# Altium PCB Display.PcbDoc
Units mil, origin at the board's own origin, x right, y up, seen from the top; angles counter-clockwise.
Board outline 6000 x 4000 mil, 2 copper layers (Top Layer, Bottom Layer); 12 components, 77 nets, 63 pads, 9 vias.
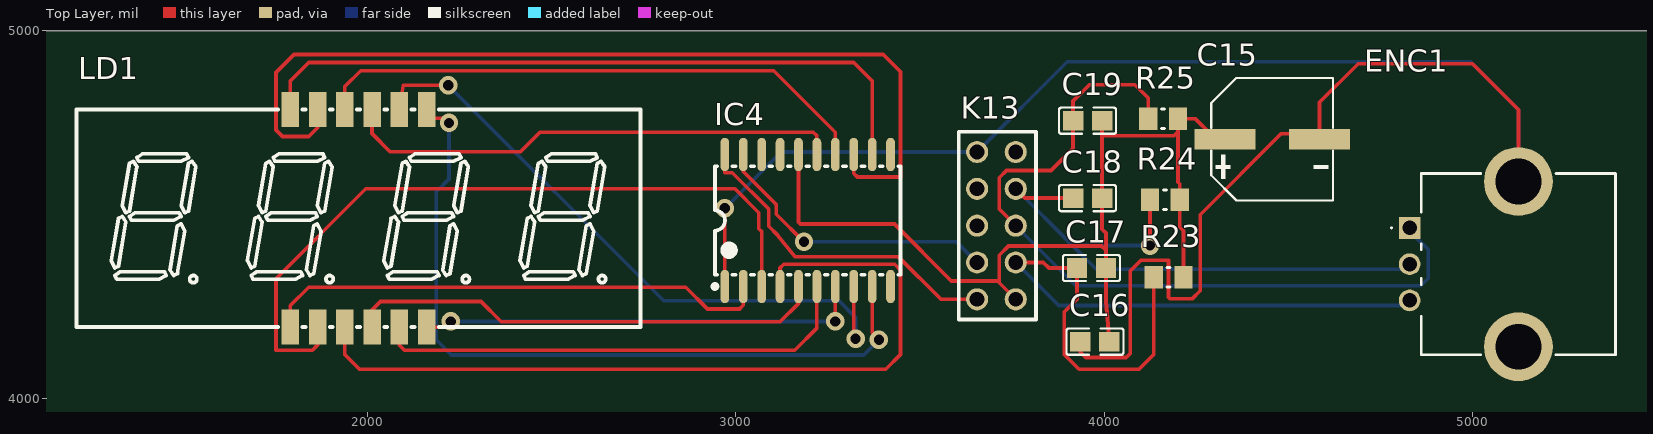
[diagram p0: Top Layer view]
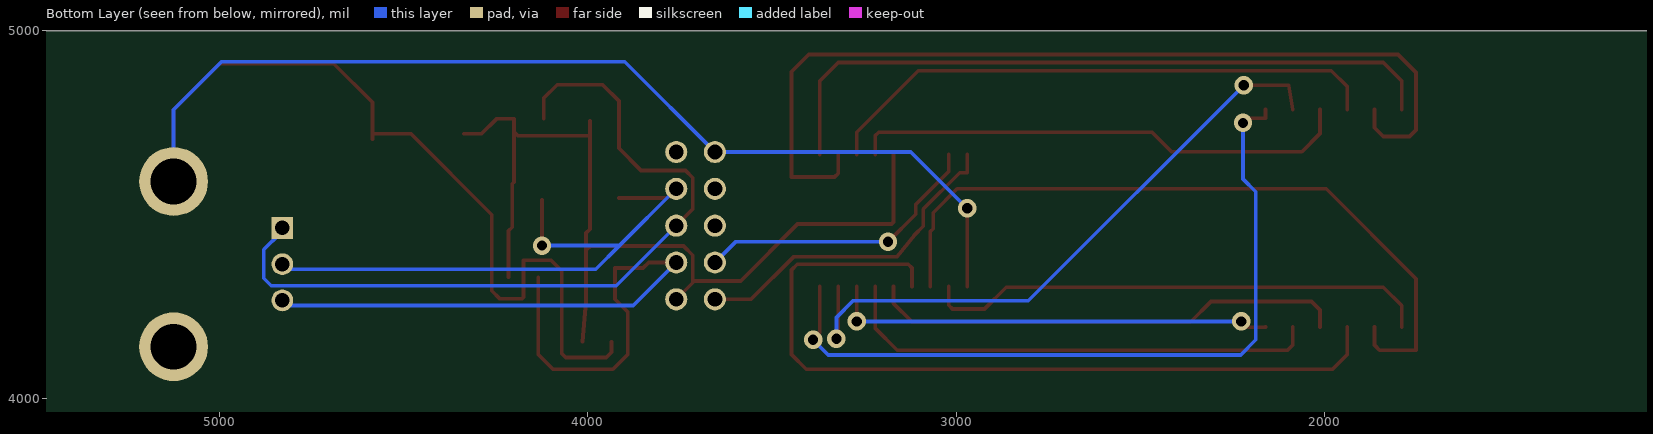
[diagram p1: Bottom Layer view, seen from below]

## Layer stack, top to bottom
Top Solder: solder mask 0.4, Solder Resist, Dk 3.5
Top Layer: signal copper 1.4
Dielectric 1: dielectric 12.6, FR-4, Dk 4.8
Bottom Layer: signal copper 1.4
Bottom Solder: solder mask 0.4, Solder Resist, Dk 3.5

## Board outline
1000,1000 7000,1000 7000,5000 1000,5000

## Design rules (kind name [scope] priority, off if disabled: settings)
Clearance [All] p1: gap=10 ignorepadtopadclearanceinfootprint=FALSE except(0: Arc-Hole Track-Hole SMDPad-Hole THPad-Hole Via-Hole Fill-Hole Poly-Hole Region-Hole Text-Hole)
PolygonConnect [All] p1: connectstyle=Relief reliefconductorwidth=10 reliefentries=4 polygonreliefangle="90 Angle" airgapwidth=10
RoutingVias [All] p1: holewidth=28 width=50 viastyle="Through Hole" minholewidth=28 minwidth=50 maxholewidth=28 maxwidth=50
SolderMaskExpansion [All] p1: expansion=4 istentingtop=FALSE
Width [All] p1: maxlimit=10 minlimit=10 preferedwidth=10
30 further rules are at their usual default settings.

## Components (designator, comment, footprint, x,y, rotation, side; value= is the part's Value field where it differs from the comment)
C15 "100uF" "C4 100uF" 4456.37,4705 r0 top
C16 "100nF" "C6,7,12,13 10nF" 3975,4155 r0 top
C17 "10nF" "C6,7,12,13 10nF" 3965.63,4355 r0 top
C18 "10nF" "C6,7,12,13 10nF" 3955,4545 r0 top
C19 "10nF" "C6,7,12,13 10nF" 3955,4755 r0 top
ENC1 "PEC11R-4225F-N0024" "ENC1 draai encoder" 4829.72,4464.02 r270 top
IC4 "TM1637" "IC4 Led driver" 3195,4484.13 r0 top
K13 "" BOxHeader_10 3670,4315 r90 top
LD1 "TOF-F4401AMG-N" LED1 1975,4490 r0 top
R23 "10K" RESC2013X50X30ML20T20 4175,4330 r0 top
R24 "10K" RESC2013X50X30ML20T20 4165,4540 r0 top
R25 "10K" RESC2013X50X30ML20T20 4160,4760 r0 top

## Footprints (in the part's own frame and the unit in brackets; to place one, negate y for a bottom-side part, rotate by r counter-clockwise, add the part's x,y. Pads: shape width x height; smd on the part's side, far side on the other; paste and mask are expansions set on the pad)
BOxHeader_10 [mil]
  round 60 hole 40: 1(-45,-90) 2(-45,15) 3(55,-90) 4(55,15) 5(155,-90) 6(155,15) 7(255,-90) 8(255,15) 9(355,-90) 10(355,15)
  silkscreen extent -100,-145 410,65
"C4 100uF" [mm]
  rect 4.2x1.4 smd: 1(-3.267,0) 2(3.267,0)
  silkscreen extent -4.2,-4.23 4.2,4.23
"C6,7,12,13 10nF" [mm] "C0805"
  rect 1.41x1.35 smd: 1(-1,0) 2(1,0)
  silkscreen extent -1.96,-0.9 1.96,0.9
"ENC1 draai encoder" [mm] "PEC11R4225FN0024"
  round 4.74 hole 3.16: 1(-3.2,7.5) 2(8.2,7.5)
  rect 1.5x1.5 hole 1: A1(0,0)
  round 1.5 hole 1: B1(5,0) C1(2.5,0)
  silkscreen extent -3.75,-1.3 8.75,14.2, body extent -10,-3.38 10,3.38, height 5.8
"IC4 Led driver" [mm] "SOP-20_L12.8-W7.5-P1.27-LS10.4-BL"
  oval 0.6x2.3 smd: 1(-5.715,-4.55) 2(-4.445,-4.55) 3(-3.175,-4.55) 4(-1.905,-4.55) 5(-0.635,-4.55) 6(0.635,-4.55) 7(1.905,-4.55) 8(3.175,-4.55) 9(4.445,-4.55) 10(5.715,-4.55) 11(5.715,4.55) 12(4.445,4.55) 13(3.175,4.55) 14(1.905,4.55) 15(0.635,4.55) 16(-0.635,4.55) 17(-1.905,4.55) 18(-3.175,4.55) 19(-4.445,4.55) 20(-5.715,4.55)
  silkscreen extent -6.55,-4.7 6.4,3.75
LED1 [mm] "LED-SEG-SMD_12P-L38.9-W15.0-P1.88-BL"
  rect 1.2x2.4 smd: 1(-4.7,-7.5) 2(-2.82,-7.5) 3(-0.94,-7.5) 4(0.94,-7.5) 5(2.82,-7.5) 6(4.7,-7.5) 7(4.7,7.5) 8(2.82,7.5) 9(0.94,7.5) 10(-0.94,7.5) 11(-2.82,7.5) 12(-4.7,7.5)
  silkscreen extent -19.45,-7.5 19.45,7.5
RESC2013X50X30ML20T20 [mm] "Chip Resistor, 2-Leads, Body 2.00x1.25mm, IPC Low Density"
  rect 1.25x1.55 smd: 1(-1.025,0) 2(1.025,0)
  silkscreen extent -0.1,-0.67 0.1,0.67, body extent -1.1,-0.72 1.1,0.72, height 0.5

## Part data
C15: library part "C4 100uF", BOM_JLCPCB Part Class="Extended Part", BOM_Manufacturer=Nichicon(尼吉康), BOM_Manufacturer Part=UWT1H101MNL1GS, BOM_Supplier=LCSC, BOM_Supplier Part=C445063, Contributor=LCSC, nameAlias=Capacitance, spicePre=C, spiceSymbolName=UWT1H101MNL1GS
C16 C17 C18 C19: library part "C6,7,12,13 10nF", BOM_JLCPCB Part Class="Extended Part", BOM_Manufacturer=CCTC(三环), BOM_Manufacturer Part=TCC0805X7R103M500DT, BOM_Supplier=LCSC, BOM_Supplier Part=C376921, Contributor=LCSC, nameAlias=Capacitance, spicePre=C, spiceSymbolName=TCC0805X7R103M500DT
ENC1: library part "ENC1 Draai encoder", "PEC11R-4225F-N0024Mechanical Encoder Rotary Incremental Flat 0.007N.m Straight Quadrature Digital Square Wave 24PPR Through Hole PC Pin", Manufacturer_Name=Bourns, Mouser Part Number=652-PEC11R-4225F-N24, Datasheet Link=https://www.bourns.com/docs/Product-Datasheets/PEC11R.pdf, Geometry.Height=31.5mm, Manufacturer_Part_Number=PEC11R-4225F-N0024, Mouser Price/Stock=https://www.mouser.co.uk/ProductDetail/Bourns/PEC11R-4225F-N0024?qs=Zq5ylnUbLm6NTsWtgy%252B2Zg%3D%3D
IC4: library part "IC4 Led driver", "TM1637(TA2007)", BOM_JLCPCB Part Class="Extended Part", BOM_Manufacturer=TM(天微), BOM_Manufacturer Part=TM1637(TA2007), BOM_Supplier=LCSC, BOM_Supplier Part=C5337160, Contributor=lcsc, spicePre=U, spiceSymbolName=TM1637(TA2007)
K13: library part "K Boxheader_10"
LD1: library part LED1, BOM_JLCPCB Part Class="Extended Part", BOM_Manufacturer=OASIS(李洲), BOM_Manufacturer Part=TOF-F4401AMG-N, BOM_Supplier=LCSC, BOM_Supplier Part=C325426, Contributor=LCSC, spicePre=L, spiceSymbolName=TOF-F4401AMG-N
R23 R24 R25: library part "R Resistor", Manufacturer="Vishay Dale", Part Number=CRCW08050000Z0EA

## Via types
v1: diameter 50, hole 28, Top Layer to Bottom Layer, 9 vias

## Nets (pads, with @x,y where several pads share a name; then routed paths per layer and width w, separated by ;. In a path a pad name is that pad's centre, name@x,y a point inside that pad or via, vN(x,y) a via of type N, cw(c..) or ccw(c..) an arc to the next point about the centre after c; other vN are vias at no path point)
+5: C15.1 C16.2 C17.2 C18.2 C19.2 IC4.16 K13.1 R23.2 R24.2 R25.2 | length 2644.4
  Top Layer w10: IC4.16 3170,4480 3175.52,4474.48 3430.66,4474.48 3585.13,4320 3710,4320 3715,4315 ; K13.1 3715,4315 ; C19.2 3994.37,4714 ; C16.2 4005,4264.37 C17.2 4005,4403 ; R23.2 4215.35,4456 4205.35,4466 R24.2 4205.35,4583.65 4200.35,4588.65 4200.35,4724.35 ; C15.1@4336.37,4720 4288,4720 4248,4760 R25.2 4200.35,4724.35 ; 3715,4315 3715,4320 3715,4390 3740,4415 3993,4415 4005,4403 ; 3994.37,4714 C18.2 3994.37,4460.63 4005,4450 4005,4403 ; 3994.37,4714 4190,4714 4200.35,4724.35
GND: C15.2 C16.1 ENC1.1 IC4.1 K13.10 | length 5044
  Top Layer w10: IC4.1 v1(2970,4517) ; C16.1 3935.63,4126.37 3950,4112 4060,4112 4071,4123 4071,4347 4100,4376 4175,4376 4175,4276 4179,4272 4240,4272 4261,4293 4261,4500 4481,4720 C15.2@4585,4720 ; C15.2 C15.2@4585,4720 ; ENC1.1 5125,4785 5000,4910 4690,4910 4585,4805 C15.2@4585,4720
  Bottom Layer w10: v1(2970,4517) 3123,4670 K13.10 3900,4915 4995,4915 5125,4785 ENC1.1
NetB1_1: 
NetB1_3: 
NetB1_4: 
NetB2_1: 
NetB2_4: 
NetC4_1: 
NetC6_2: 
NetC7_2: 
NetC11_1: 
NetC12_2: 
NetC13_2: 
NetC14_1: 
NetC14_2: 
NetC17_1: C17.1 ENC1.B1 K13.3 R23.1 | length 2030.8
  Top Layer w10: K13.3 3835,4370 3850,4355 C17.1 3926.26,4270 3892,4235.74 3892,4120 3932,4080 4094.65,4080 4134.65,4120 R23.1
  Bottom Layer w10: K13.3 3876.85,4253.15 ENC1.B1@4835,4253.15
NetC18_1: C18.1 ENC1.C1 K13.7 R24.1 | length 1666.1
  Top Layer w10: K13.7 3785,4545 C18.1 ; v1(4124.65,4416) R24.1
  Bottom Layer w10: K13.7 3914,4416 ; v1(4124.65,4416) 3914,4416 ; ENC1.C1@4835,4351.57 3978.43,4351.57 3914,4416
NetC19_1: C19.1 ENC1.A1 K13.5 R25.1 | length 2142.6
  Top Layer w10: K13.5 3715,4515 3715,4600 3735,4620 3855.63,4620 3915.63,4680 C19.1 3915.63,4808.63 3960,4853 4083.29,4853 4119.65,4816.65 R25.1
  Bottom Layer w10: K13.5 3923,4307 4860,4307 4880,4327 4880,4405 ENC1.A1@4835,4450
NetD1_1: 
NetD1_2: 
NetD2_1: 
NetIC2_1: 
NetIC2_2: 
NetIC2_6: 
NetIC2_7: 
NetIC3_1: 
NetIC3_2: 
NetIC3_3: 
NetIC3_10: 
NetIC3_11: 
NetIC3_16: 
NetIC3_17: 
NetIC3_23: 
NetIC3_24: 
NetIC3_25: 
NetIC3_26: 
NetIC3_27: 
NetIC3_30: 
NetIC3_31: 
NetIC3_32: 
NetIC3_33: 
NetIC3_34: 
NetIC3_35: 
NetIC3_38: 
NetIC3_39: 
NetIC3_41: 
NetIC3_44: 
NetIC3_45: 
NetIC3_46: 
NetIC3_47: 
NetIC3_48: 
NetIC4_2: IC4.2 LD1.1 | length 1388.6
  Top Layer w10: LD1.1 1789.96,4252.96 1840,4303 2864,4303 2923,4244 3010,4244 3020,4254 IC4.2
NetIC4_3: IC4.3 LD1.2 | length 2004
  Top Layer w10: LD1.2 1863.98,4145.98 1850,4132 1751,4132 1751,4326 1995,4570 2997.29,4570 3062,4505.29 3062,4462 3070,4454 IC4.3
NetIC4_4: IC4.4 LD1.3 | length 2234.6
  Top Layer w10: LD1.3 1937.99,4120 1977.99,4080 3407,4080 3447,4120 3447,4350 3431.72,4365.28 3130,4365.28 3120,4355.28 IC4.4
NetIC4_5: IC4.5 LD1.4 | length 1303.3
  Top Layer w10: LD1.4 2012.01,4241 2035.01,4264 2308,4264 2363,4209 3120,4209 3170,4259 IC4.5
NetIC4_6: IC4.6 LD1.5 | length 1326.4
  Top Layer w10: LD1.5 2086.02,4145.98 2100,4132 3160,4132 3220,4192 IC4.6
NetIC4_7: IC4.7 LD1.6 | length 1212.3
  Top Layer w10: LD1.6 2160.04,4194 2210,4194 v1(2226,4210) ; v1(3270,4210) IC4.7
  Bottom Layer w10: v1(2226,4210) v1(3270,4210)
NetIC4_8: IC4.8 LD1.8 | length 1757.6
  Top Layer w10: LD1.8 2097.02,4851 v1(2219,4851) ; IC4.8 3320,4168 v1(3325,4163)
  Bottom Layer w10: v1(2219,4851) 2804,4266 3280,4266 3325,4221 v1(3325,4163)
NetIC4_9: IC4.9 LD1.7 | length 2082
  Top Layer w10: LD1.7 2160.04,4762 2208,4762 v1(2221,4749) ; IC4.9 3370,4179 v1(3388.5,4160.5)
  Bottom Layer w10: v1(2221,4749) 2221,4597 2186,4562 2186,4160 2227,4119 3347,4119 v1(3388.5,4160.5)
NetIC4_12: IC4.12 LD1.12 | length 1898.9
  Top Layer w10: LD1.12 1789.96,4862.96 1840,4913 3320,4913 3370,4863 IC4.12
NetIC4_13: IC4.13 LD1.11 | length 2539.8
  Top Layer w10: LD1.11 1863.98,4735.98 1840,4712 1769,4712 1751,4730 1751,4886 1800,4935 3400,4935 3447,4888 3447,4602 3330,4602 3320,4612 IC4.13
NetIC4_14: IC4.14 LD1.10 | length 1542.5
  Top Layer w10: LD1.10 1937.99,4848 1980.99,4891 3103,4891 3270,4724 IC4.14
NetIC4_15: IC4.15 LD1.9 | length 1370.4
  Top Layer w10: LD1.9 2012.01,4720 2061.01,4671 2415,4671 2468,4724 3210,4724 3220,4714 IC4.15
NetIC4_19: IC4.19 K13.4 | length 798.8
  Top Layer w10: IC4.19 3020,4617 3109.69,4527.31 3109.69,4501.31 v1(3185,4426)
  Bottom Layer w10: v1(3185,4426) 3599,4426 K13.4
NetIC4_20: IC4.20 K13.2 | length 907.8
  Top Layer w10: IC4.20 2970,4614 2990,4614 3089,4515 3089,4468.62 3113,4444.62 3160.72,4385.28 3441.72,4385.28 3557,4270 K13.2
NetK2_2: 
NetK3_1: 
NetK8_1: 
NetK8_2: 
NetL2_4: 
NetR7_2: 
NetR11_1: 
NetR17_1: 
NetR18_1: 
NetR18_2: 
NetR19_2: 
VIN: 
pads on no net: ENC1.2 IC4.10 IC4.11 IC4.17 IC4.18 K13.6 K13.8 K13.9